# Allegro board My_AVRUSB500.brd
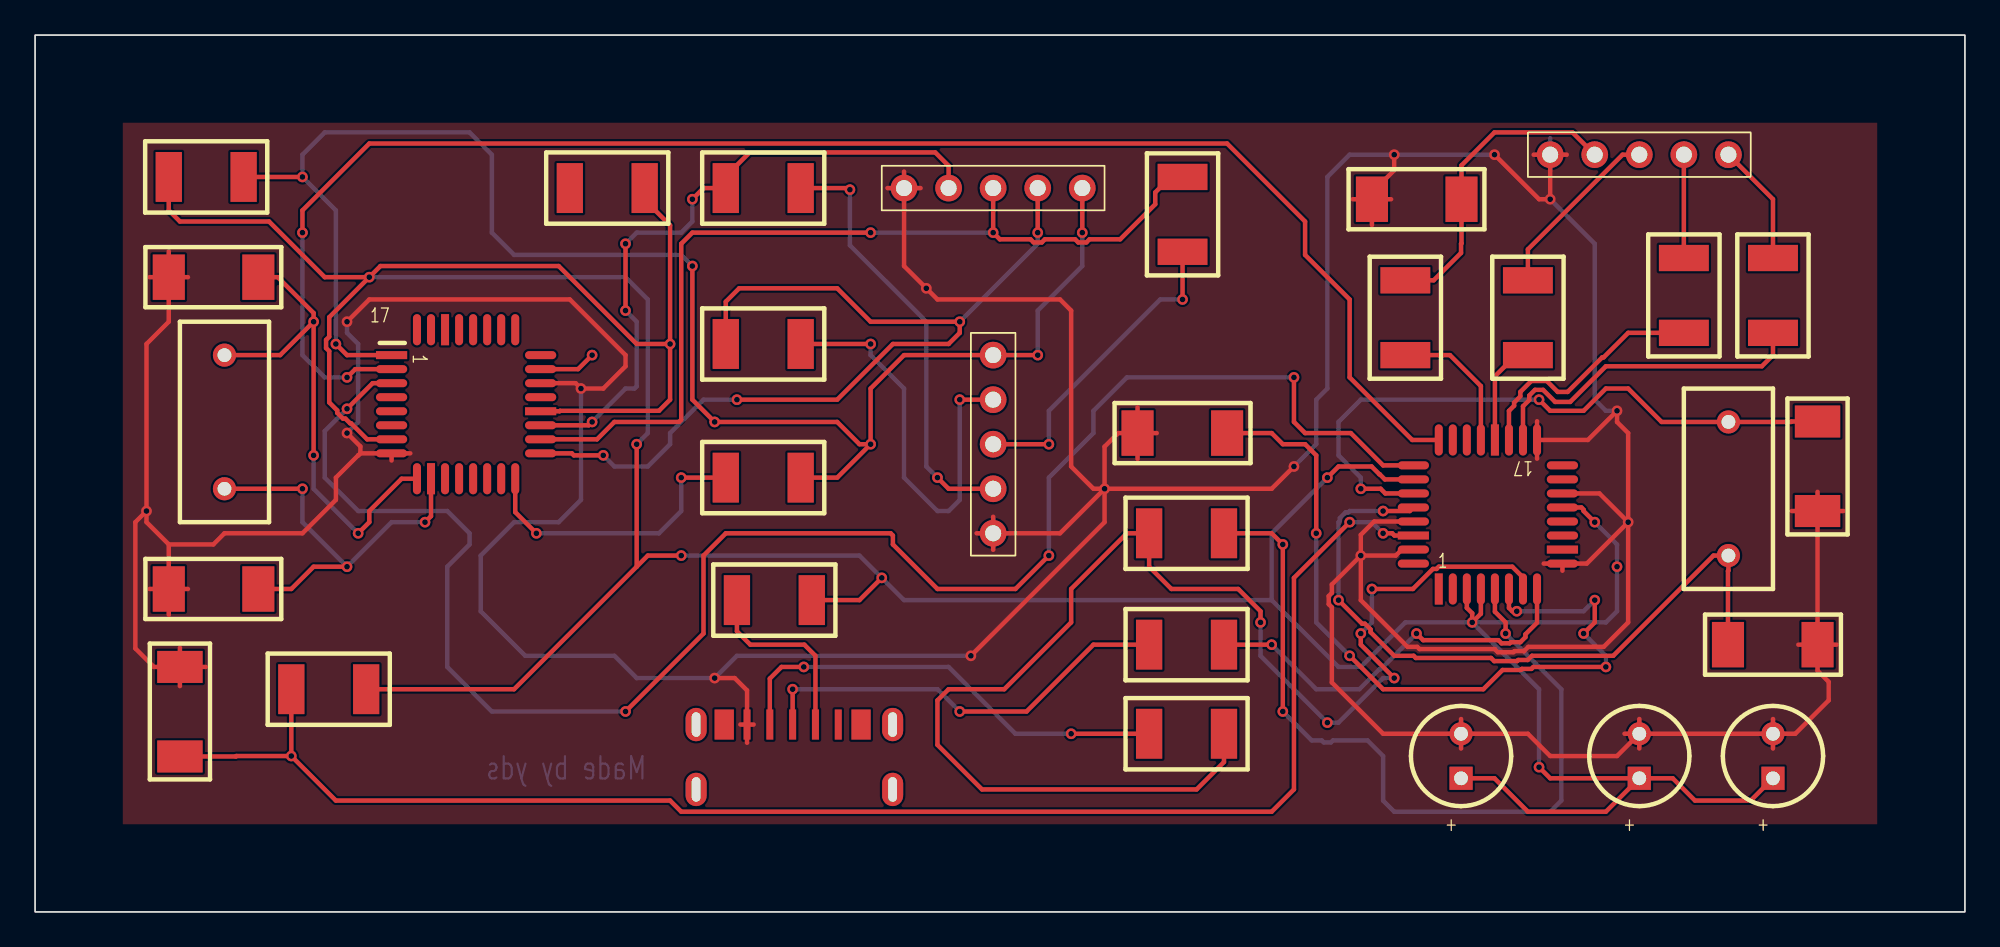
[diagram p0: board, top side]
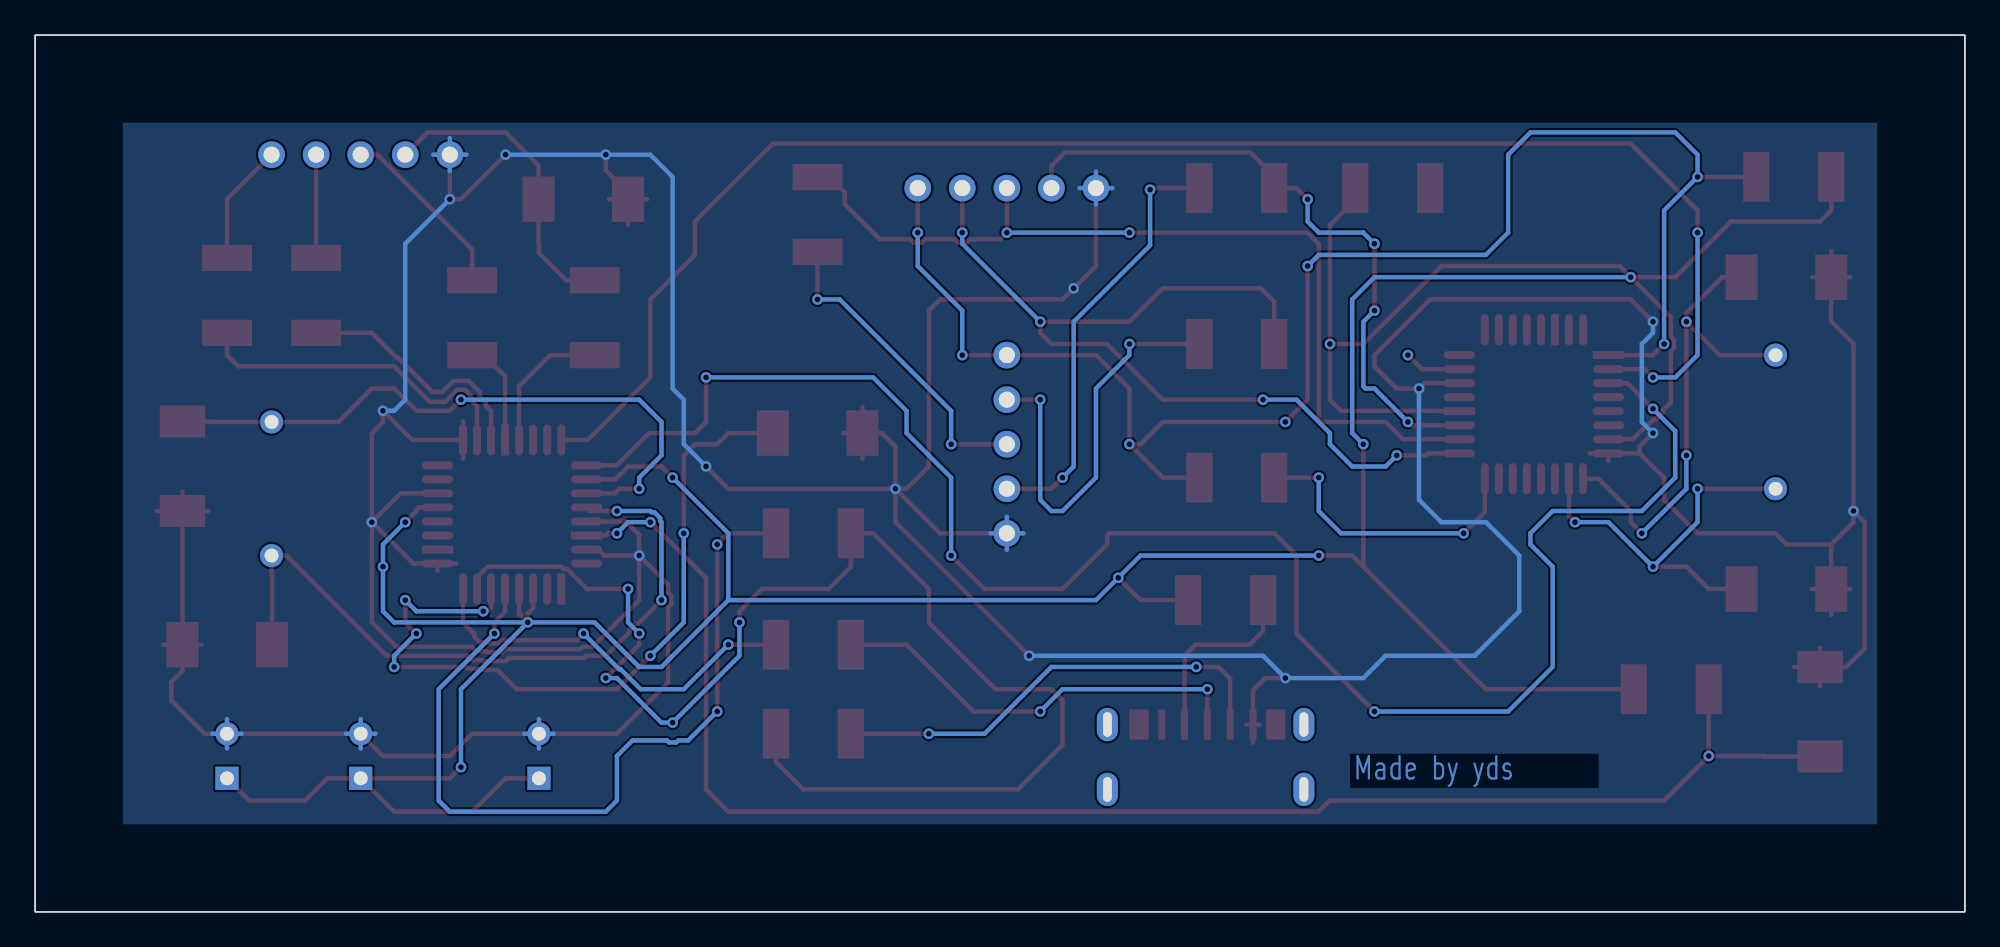
[diagram p1: board, bottom side, seen from below]

Outline 110 x 50 mm; copper layers: TOP, BOTTOM. Coordinates in mm from the lower left corner of the outline.
Outline path: rectangle 0,0 110,50

## Design rules (mm)
constraint set DEFAULT: min track width 0.127
net group POWERRULL: nets +5V VCC

## Placement (name value [footprint] x y rotation side)
C1  47nF  [CPCYL1D225LS100031#2]  8.26 13.97 270 top
C2  27pF  [CPCYL1D225LS100031#2]  101.6 15.24 180 top
C3  27pF  [CPCYL1D225LS100031#2]  101.6 22.86 90 top
C4  47nF  [CPCYL1D225LS100031#2]  67.94 27.3 180 top
C5  100nF  [CPCYL1D225LS100031]  91.44 7.62 90 top
C6  1uF  [CPCYL1D225LS100031]  99.06 7.62 90 top
C9  100nF  [CPCYL1D225LS100031]  81.28 7.62 90 top
C10  22nF  [CPCYL1D225LS100031#2]  76.2 40.64 0 top
C11  100nF  [CPCYL1D225LS100031#2]  7.62 36.2 0 top
C12  100nF  [CPCYL1D225LS100031#2]  7.62 18.41 0 top
IC2  ATmega8  [QUAD80M32WG900]  20.32 31.75 270 top
J1  bbpg_Bitbang  [JUMPER5]  96.52 43.18 180 top
J2  USBA  [MY_USB]  43.18 6.99 0 top
J5  avrusb500_out  [JUMPER5]  54.61 31.75 270 top
J6  firmware_in  [JUMPER5]  59.69 41.27 180 top
NOREF  -  []  0 50 0 top
NOREF#2  -  []  0 0 90 top
R1  470  [AX400X100031]  14.61 12.7 0 top
R2  220  [AX400X100031]  78.11 31.75 90 top
R3  220  [AX400X100031]  85.09 31.75 90 top
R4  220  [AX400X100031]  93.98 33.02 90 top
R5  27  [AX400X100031]  63.5 15.24 0 top
R6  27  [AX400X100031]  63.5 10.16 0 top
R7  1.5k  [AX400X100031]  63.5 21.59 0 top
R8  2.2  [AX400X100031]  40.01 17.78 0 top
R14  220  [AX400X100031]  99.06 33.02 90 top
R16  10k  [AX400X100031]  7.62 41.91 0 top
R17  470  [AX400X100031]  30.48 41.27 0 top
R18  1k  [AX400X100031]  39.37 41.27 0 top
R19  220  [AX400X100031]  65.41 41.91 270 top
R20  1k  [AX400X100031]  39.37 32.38 0 top
R21  220  [AX400X100031]  39.37 24.77 0 top
U1  FT232BM  [QUAD80M32WG900]  80.01 18.41 0 top
Y2  6Mhz  [RAD450X200LS300031]  96.52 20.32 90 top
Y3  3.6864Mhz  [RAD450X200LS300031]  10.79 24.13 90 top

## Library data of the parts
C1-C4 C10-C12 = CAPACITOR NON-POL: alternate symbols: (SMR2010)
C5 C9 = CAPACITOR NON-POL: alternate symbols: (SMDCAP)
C6 = CAPACITOR POL: alternate symbols: (SMDCAP)
IC2 = ATmega8-DIL28_2
J1 J5 J6 = CON5: User Part Number: ***
J2 = CON4_7
R1-R8 R14 R16-R21 = R: alternate symbols: (SML2015)
U1 = FT232BM_2: alternate symbols: (JEDECMS026)
Y2 Y3 = ZTA

## Footprints (pads in the part's own frame, mm; a bottom-side part is the same pattern mirrored in y, then rotated)
AX400X100031
  rect 1.499x2.845 smd: 1(0,0) 2(4.267,0)
CPCYL1D225LS100031
  rect 1.321x1.321 hole 0.787: 1(0,0)
  round 1.321 hole 0.787: 2(2.54,0)
CPCYL1D225LS100031#2
  rect 1.829x2.591 smd: 1(0,0) 2(5.105,0)
JUMPER5
  round 1.524 hole 0.914: 1(0,0) 2(2.54,0) 3(5.08,0) 4(7.62,0) 5(10.16,0)
MY_USB
  oval 1.2x1.9 hole 0.5x1.4: (-5.5,3.7) (-5.5,0) (5.7,3.7) (5.7,0)
  rect 1.1x1.72 smd: (-3.9,3.7) (3.9,3.7)
  rect 0.4x1.72 smd: 1(-2.6,3.7) 2(-1.3,3.7) 3(0,3.7) 4(1.3,3.7) 5(2.6,3.7)
QUAD80M32WG900
  rect 0.457x1.778 smd: 1(0,0) 20(3.2,8.496)
  oval 0.457x1.778 smd: 2(0.8,0) 3(1.6,0) 4(2.4,0) 5(3.2,0) 6(4,0) 7(4.801,0) 8(5.601,0) 17(5.601,8.496) 18(4.801,8.496) 19(4,8.496) 21(2.4,8.496) 22(1.6,8.496) 23(0.8,8.496) 24(0,8.496)
  oval 1.778x0.457 smd: 9(7.048,1.448) 11(7.048,3.048) 12(7.048,3.848) 13(7.048,4.648) 14(7.048,5.448) 15(7.048,6.248) 16(7.048,7.048) 25(-1.448,7.048) 26(-1.448,6.248) 27(-1.448,5.448) 28(-1.448,4.648) 29(-1.448,3.848) 31(-1.448,2.248) 32(-1.448,1.448)
  rect 1.778x0.457 smd: 10(7.048,2.248) 30(-1.448,3.048)
RAD450X200LS300031
  round 1.321 hole 0.787: 1(0,0) 2(7.62,0)

## Nets
+5V: J2.4 R8.1
GND: C1.1 C2.1 C3.1 C4.2 C5.2 C6.2 C9.2 C10.1 C11.1 C12.1 IC2.8 IC2.22 J1.5 J2.1 J5.5 J6.5 U1.9 U1.14 U1.17 U1.29 U1.31
VCC: C5.1 C6.1 C9.1 IC2.7(VCC) IC2.20 R1.2 R8.2 R16.1 R17.2 U1.3 U1.4 U1.13 U1.26
BMISO: J1.3 R3.2
BMOSI: J1.2 R4.2
BRESET: J1.1 R14.2
BSCK: C10.2 J1.4 R2.2
D+: J2.2 R6.1
D-: J2.3 R5.1
F_MISO: IC2.18 J6.3 R19.1
F_MOSI: IC2.17 J6.2 R20.1
F_SCK: IC2.19 J6.4 R18.1
MISO: J5.3 R19.2
MOSI: J5.2 R20.2
RESET: IC2.1 J5.1 J6.1 R16.2 R21.2
RXD: IC2.2 U1.24
SCK: J5.4 R18.2
TXD: IC2.3 U1.25
N02483: R6.2 R7.1 U1.7
N02615: R5.2 U1.8
N03527: C4.1 U1.6
N06839: R2.1 U1.21
N06967: R3.1 U1.20
N07033: R4.1 U1.19
N07247: R14.1 U1.18
N11951: R7.2 U1.5
N41098: C3.2 U1.27 Y2.2
N41106: C2.2 U1.28(XTOUT) Y2.1
N49165: C1.2 R1.1 U1.30
N99979: IC2.23
N99983: R17.1
N99995: C11.2 IC2.9 Y3.2
N100131: C12.2 IC2.10 Y3.1
N100273: IC2.16 R21.1

Pads without a net: IC2 4 5 6 11 12 13 14 15 21 24 25 26 27 28 29 30 31 32; J2 5; U1 1 2 10 11 12 15 16 22 23 32

## Via types
v1: diameter 0.61, hole 0.33, TOP to BOTTOM, 90 vias

## Routing (per net, layer and track width the routed paths; a pad name or vN(x,y) marks a point on that pad's centre or on a via; arc(x,y) is an arc through that point)
+5V: length 10.8
  TOP w0.254: J2.4 44.48,14.61 43.84,15.24 40.77,15.24 40.01,16 R8.1
GND: length 413
  TOP w0.254: v1(83.19,43.18) 85.72,40.64 v1(86.36,40.64) J1.5 ; U1.31 77.9,20.66 77.56,20.32 v1(75.56,20.32) ; C4.2 62.84,28.78 ; C4.2 63.93,27.3 ; C4.2 61.73,27.3 60.96,26.53 v1(60.96,24.13) ; C4.2 62.84,25.83 ; v1(60.96,24.13) 70.48,24.13 v1(71.75,25.4) ; v1(60.96,24.13) 60.96,22.23 v1(53.34,14.61) ; v1(60.96,24.13) 58.42,21.59 J5.5 ; v1(60.96,24.13) 60.33,24.13 59.05,25.4 59.05,34.29 58.42,34.92 51.44,34.92 v1(50.8,35.56) 49.53,36.83 J6.5 ; 81.28,9.32 C9.2 ; C9.2 85.09,10.16 86.36,8.89 90.17,8.89 C5.2 ; C9.2 76.83,10.16 73.92,13.08 73.92,17.37 73.74,17.55 73.74,18.01 73.92,18.19 73.92,18.67 v1(75.56,20.32) ; C9.2 81.28,11 ; C6.2 100.33,10.16 102.23,12.06 102.23,13.12 101.6,13.75 C2.1 ; C6.2 99.06,9.32 ; C6.2 C5.2 ; C6.2 99.06,11 ; 91.44,9.32 C5.2 ; C5.2 90.6,10.16 ; C5.2 91.44,11 ; v1(6.35,22.86) 6.35,22.23 7.62,20.95 ; v1(6.35,22.86) 5.71,22.23 5.71,15.02 6.77,13.97 C1.1 ; v1(6.35,22.86) 6.35,32.38 7.62,33.66 C11.1 ; 54.61,20.65 J5.5 ; J5.5 54.61,22.53 ; J5.5 53.67,21.59 ; C12.1 8.71,18.41 ; C12.1 6.53,18.41 ; C12.1 7.62,20.95 ; C12.1 7.62,16.94 ; v1(90.81,22.23) 88.44,19.86 U1.9 ; v1(90.81,22.23) 90.81,16.51 89.41,15.11 85.11,15.11 84.87,14.87 84.33,14.87 84.26,14.81 83.38,14.81 83.2,14.99 78.91,14.99 78.78,15.11 78.23,15.11 75.56,17.78 v1(75.56,20.32) ; v1(90.81,22.23) 89.17,23.86 U1.14 ; v1(90.81,22.23) 90.81,27.3 90.17,27.94 v1(90.17,28.57) 88.51,26.91 U1.17 ; C11.1 8.71,36.2 ; C11.1 6.53,36.2 ; C11.1 7.62,37.67 ; C3.1 103.07,22.86 ; C3.1 C2.1 ; C3.1 100.13,22.86 ; C3.1 101.6,23.95 ; v1(77.47,43.18) 77.47,42.29 76.2,41.02 C10.1 ; 87.06,19.46 U1.9 ; U1.9 85.99,19.86 ; v1(17.78,33.66) 19.05,34.92 30.48,34.92 33.66,31.75 33.66,31.11 32.38,29.84 v1(31.11,29.84) 30.81,30.15 IC2.22 ; v1(38.73,13.34) 39.88,13.34 40.58,12.63 J2.1 ; v1(75.56,20.32) 75.56,21.5 76.33,22.26 U1.29 ; C1.1 8.26,12.88 ; C1.1 8.26,15.06 ; C1.1 9.73,13.97 ; IC2.8 18.54,26.15 ; IC2.8 21.39,26.15 ; IC2.8 20.32,25.74 ; 18.54,26.15 18.43,26.04 18.41,26.04 17.14,24.77 17.14,23.5 15.24,21.59 10.79,21.59 10.16,20.95 7.62,20.95 ; 18.54,26.15 18.54,26.54 v1(17.78,27.3) ; J6.5 50.47,41.27 ; J6.5 49.53,42.22 ; J6.5 48.59,41.27 ; C2.1 100.51,15.24 ; C2.1 102.69,15.24 ; J1.5 87.3,43.18 ; J1.5 85.42,43.18 ; C10.1 76.2,39.17 ; C10.1 75.11,40.64 ; C10.1 77.29,40.64 ; J2.1 40.58,9.65 ; J2.1 40.96,10.69 ; J2.1 40.2,10.69 ; 85.61,25.84 U1.17 ; U1.17 85.61,27.98
  BOTTOM w0.254: 53.67,21.59 J5.5 ; J5.5 55.55,21.59 ; J5.5 54.61,22.53 ; J5.5 54.61,20.65 ; C5.2 91.44,11 ; C5.2 91.44,9.32 ; C5.2 92.28,10.16 ; C5.2 90.6,10.16 ; 99.06,9.32 C6.2 ; C6.2 99.9,10.16 ; C6.2 99.06,11 ; C6.2 98.22,10.16 ; 49.53,40.34 J6.5 ; J6.5 50.47,41.27 ; J6.5 49.53,42.22 ; J6.5 48.59,41.27 ; v1(86.36,40.64) 88.9,38.1 88.9,29.21 89.53,28.57 v1(90.17,28.57) ; v1(17.78,33.66) 17.78,33.02 18.41,32.38 18.41,27.94 v1(17.78,27.3) ; J1.5 86.36,44.12 ; J1.5 86.36,42.24 ; J1.5 87.3,43.18 ; J1.5 85.42,43.18 ; v1(31.11,29.84) 31.11,23.5 29.84,22.23 27.3,22.23 25.4,20.32 25.4,17.14 27.94,14.61 33.02,14.61 34.29,13.34 v1(38.73,13.34) 40.01,14.61 v1(53.34,14.61) ; C9.2 81.28,11 ; C9.2 81.28,9.32 ; C9.2 82.12,10.16 ; C9.2 80.44,10.16 ; v1(83.19,43.18) v1(77.47,43.18) 74.93,43.18 73.66,41.91 73.66,29.84 73.03,29.21 73.03,26.67 v1(71.75,25.4)
VCC: length 244
  TOP w0.254: R8.2 46.99,17.78 v1(48.26,19.05) ; R16.1 7.62,40.01 8.26,39.37 13.34,39.37 16.51,36.2 v1(19.05,36.2) ; U1.3 81.61,17.34 81.92,17.03 v1(81.92,16.51) 82.41,17.01 U1.4 ; C6.1 97.79,6.35 94.61,6.35 93.34,7.62 C5.1 ; U1.26 76.94,24.66 76.64,24.96 76.62,24.96 76.18,25.4 74.3,25.4 v1(73.66,24.77) ; v1(19.05,36.2) 19.68,36.83 29.84,36.83 34.29,32.38 v1(36.2,32.38) ; v1(19.05,36.2) 16.76,33.91 16.76,32.8 16.59,32.62 16.59,32.15 16.76,31.97 16.76,29.05 17.22,28.6 17.22,28.46 17.55,28.13 17.69,28.13 17.95,27.86 18.01,27.86 18.93,26.95 IC2.7 ; C5.1 86.36,7.62 v1(85.72,8.26) ; C5.1 89.53,5.71 85.09,5.71 83.19,7.62 C9.1 ; R17.2 34.75,40.6 36.2,39.15 v1(36.2,32.38) ; v1(36.2,32.38) 36.2,29.21 35.56,28.57 29.92,28.57 29.9,28.55 IC2.20 ; 34.29,19.68 34.92,20.32 v1(36.83,20.32) ; 34.29,19.68 v1(34.29,26.67) ; 34.29,19.68 27.3,12.7 R1.2 ; U1.13 88.14,23.06 88.27,22.94 88.27,22.86 v1(88.9,22.23)
  BOTTOM w0.254: v1(19.05,36.2) 33.66,36.2 34.92,34.92 34.92,27.3 v1(34.29,26.67) ; v1(88.9,22.23) 90.17,20.95 v1(90.17,19.68) 90.17,17.14 89.53,16.51 v1(81.92,16.51) ; v1(81.92,16.51) 85.72,12.7 v1(85.72,8.26) ; v1(81.92,16.51) 78.11,16.51 75.56,13.97 74.3,13.97 70.48,17.78 ; v1(36.83,20.32) 46.99,20.32 v1(48.26,19.05) 49.53,17.78 70.48,17.78 ; 70.48,17.78 70.48,21.59 v1(73.66,24.77)
BMISO: length 10.4
  TOP w0.254: R3.2 85.09,37.78 90.49,43.18 J1.3
BMOSI: length 5.9
  TOP w0.254: J1.2 R4.2
BRESET: length 6.9
  TOP w0.254: J1.1 99.06,40.64 R14.2
BSCK: length 17.7
  TOP w0.254: R2.2 79.72,36.02 81.28,37.58 81.28,38.1 81.31,38.13 C10.2 81.31,42.57 83.19,44.45 87.63,44.45 J1.4
D+: length 26.1
  TOP w0.254: J2.2 41.88,13.3 42.55,13.97 v1(43.81,13.97) ; v1(59.05,10.16) R6.1
  BOTTOM w0.254: v1(59.05,10.16) 55.88,10.16 52.07,13.97 v1(43.81,13.97)
D-: length 24.4
  TOP w0.254: v1(52.7,11.43) 56.52,11.43 60.33,15.24 R5.1 ; J2.3 v1(43.18,12.7)
  BOTTOM w0.254: v1(52.7,11.43) 51.44,12.7 v1(43.18,12.7)
F_MISO: length 52.2
  TOP w0.254: v1(47.62,38.73) 37.47,38.73 36.83,38.1 36.83,28.07 36.7,27.94 33.02,27.94 32.03,26.95 IC2.18 ; J6.3 v1(54.61,38.73) 54.99,38.35 56.74,38.35 56.92,38.18 57.38,38.18 57.56,38.35 59.28,38.35 59.46,38.18 59.92,38.18 60.1,38.35 61.85,38.35 63.85,40.35 63.85,41.03 64.73,41.91 R19.1
  BOTTOM w0.254: v1(47.62,38.73) v1(54.61,38.73)
F_MOSI: length 54.7
  TOP w0.254: J6.2 v1(57.15,38.73) ; IC2.17 30.59,26.15 30.71,26.04 v1(32.38,26.04) ; R20.1 39.37,34.8 40.13,35.56 45.72,35.56 47.62,33.66 v1(52.7,33.66) 52.7,33.02 52.07,32.38 48.9,32.38 45.72,29.21 v1(40.01,29.21)
  BOTTOM w0.254: v1(32.38,26.04) 33.02,25.4 34.92,25.4 36.2,26.67 36.2,27.3 38.1,29.21 v1(40.01,29.21) ; v1(57.15,38.73) 57.15,38.1 v1(52.7,33.66)
F_SCK: length 38.1
  TOP w0.254: v1(31.75,27.94) 31.56,27.75 IC2.19 ; v1(37.47,40.64) 38.1,41.27 R18.1 39.37,41.95 40.73,43.31 51.31,43.31 52.07,42.55 J6.4 ; v1(33.66,38.1) v1(33.66,34.29)
  BOTTOM w0.254: v1(31.75,27.94) 33.66,29.84 34.16,29.84 34.29,29.97 34.29,33.66 v1(33.66,34.29) ; v1(33.66,38.1) 34.29,38.73 36.83,38.73 37.47,39.37 v1(37.47,40.64)
MISO: length 18
  TOP w0.254: R19.2 v1(65.41,34.92) ; v1(57.78,26.67) J5.3
  BOTTOM w0.254: v1(65.41,34.92) 64.13,34.92 57.78,28.58 v1(57.78,26.67)
MOSI: length 24.2
  TOP w0.254: R20.2 v1(47.62,32.38) ; v1(52.7,29.21) J5.2
  BOTTOM w0.254: v1(52.7,29.21) 52.7,23.5 52.07,22.86 51.44,22.86 49.53,24.77 49.53,29.84 47.62,31.75 v1(47.62,32.38)
RESET: length 94.6
  TOP w0.254: IC2.1 17.78,31.75 v1(17.14,32.38) ; J6.1 v1(59.69,38.73) ; v1(47.62,26.67) 45.72,24.77 R21.2 ; v1(47.62,26.67) 47.62,29.84 49.53,31.75 J5.1 v1(57.15,31.75) ; v1(47.62,26.67) 46.99,26.67 45.72,27.94 v1(38.73,27.94) 37.47,29.21 v1(37.47,36.83) ; v1(15.24,41.91) R16.2
  BOTTOM w0.254: v1(57.15,31.75) 57.15,34.29 59.69,36.83 v1(59.69,38.73) ; v1(17.14,32.38) 17.14,40.01 v1(15.24,41.91) 15.24,43.18 16.51,44.45 24.77,44.45 26.04,43.18 26.04,38.73 27.3,37.47 36.83,37.47 v1(37.47,36.83)
RXD: length 91.1
  TOP w0.254: IC2.2 18.25,30.95 v1(17.78,30.48) ; v1(15.24,38.73) 15.24,40.01 19.05,43.81 67.94,43.81 72.39,39.37 72.39,37.47 74.93,34.92 74.93,30.48 78.5,26.91 U1.24
  BOTTOM w0.254: v1(17.78,30.48) 16.51,30.48 15.24,31.75 v1(15.24,38.73)
SCK: length 24.8
  TOP w0.254: R18.2 46.35,41.27 v1(46.44,41.19) ; J5.4 52.07,24.13 v1(51.44,24.77)
  BOTTOM w0.254: v1(51.44,24.77) 50.8,25.4 50.8,33.66 46.44,38.01 v1(46.44,41.19)
TXD: length 101.8
  TOP w0.254: IC2.3 19.24,30.15 v1(17.78,28.69) ; v1(33.66,11.43) 38.1,15.88 38.1,20.32 39.37,21.59 48.77,21.59 48.9,21.46 48.9,20.95 51.44,18.41 55.88,18.41 v1(57.78,20.32) ; U1.25 76.83,25.46 74.99,27.3 72.39,27.3 71.75,27.94 v1(71.75,30.48)
  BOTTOM w0.254: v1(17.78,28.69) 16.51,27.42 16.51,24.77 18.41,22.86 23.5,22.86 24.77,21.59 24.77,20.95 23.5,19.68 23.5,13.97 26.04,11.43 v1(33.66,11.43) ; v1(57.78,20.32) 57.78,24.77 60.33,27.3 60.33,28.57 62.23,30.48 v1(71.75,30.48)
N02483: length 77.6
  TOP w0.254: v1(75.56,15.88) 75.56,15.24 v1(77.47,13.34) ; U1.7 84.81,19.08 84.2,19.68 80.01,19.68 79.88,19.56 79.68,19.56 78.53,18.41 v1(76.2,18.41) ; v1(69.85,16.51) 69.85,17.14 68.58,18.41 64.77,18.41 63.5,19.68 R7.1 62.23,21.59 59.05,18.41 59.05,16.51 55.24,12.7 52.07,12.7 51.44,12.06 51.44,9.53 53.98,6.99 66.21,6.99 67.77,8.55 R6.2
  BOTTOM w0.254: v1(69.85,16.51) 69.85,14.61 v1(73.66,10.79) 74.3,10.79 76.83,13.34 v1(77.47,13.34) ; v1(75.56,15.88) 76.2,16.51 v1(76.2,18.41)
N02615: length 22.9
  TOP w0.254: v1(78.74,15.88) 79.12,15.49 83.41,15.49 83.59,15.32 84.05,15.32 84.11,15.38 84.66,15.38 84.95,15.67 84.95,15.83 85.61,16.49 U1.8 ; v1(70.48,15.24) R5.2
  BOTTOM w0.254: v1(70.48,15.24) 73.03,12.7 75.48,12.7 76.62,13.84 76.71,13.84 v1(78.74,15.88)
N03527: length 44.7
  TOP w0.254: v1(74.93,14.61) 76.83,12.7 82.55,12.7 83.65,13.8 84.68,13.8 84.75,13.86 85.29,13.86 85.4,13.97 v1(89.53,13.97) ; v1(88.27,15.88) 88.9,16.51 v1(88.9,17.78) ; C4.1 70.48,27.3 71.12,26.67 72.39,26.67 73.03,26.04 v1(73.03,21.59) ; v1(84.45,17.14) 84.2,17.14 84.01,17.34 U1.6
  BOTTOM w0.254: v1(84.45,17.14) 88.27,17.14 v1(88.9,17.78) ; v1(89.53,13.97) 89.53,14.61 v1(88.27,15.88) ; v1(74.93,14.61) 73.03,16.51 v1(73.03,21.59)
N06839: length 8.1
  TOP w0.254: R2.1 80.64,31.75 82.41,29.98 U1.21
N06967: length 6
  TOP w0.254: U1.20 83.21,30.54 84.42,31.75 R3.1
N07033: length 14.2
  TOP w0.254: U1.19 84.01,28.57 84.3,28.86 84.3,29.04 84.66,29.4 84.66,29.65 85.28,30.28 86.17,30.28 86.79,29.65 87.35,29.65 89.32,31.62 89.41,31.62 90.81,33.02 R4.1
N07247: length 19.4
  TOP w0.254: U1.18 84.81,28.83 85.17,29.19 85.17,29.44 85.49,29.77 85.96,29.77 86.64,29.08 87.5,29.08 89.53,31.11 98.42,31.11 99.06,31.75 R14.1
N11951: length 46.9
  TOP w0.254: v1(71.12,11.43) v1(71.12,20.95) 70.48,21.59 R7.2 ; U1.5 83.21,17.12 83.82,16.51 v1(83.82,15.88)
  BOTTOM w0.254: v1(83.82,15.88) 87,12.7 87,6.35 86.36,5.71 77.47,5.71 76.83,6.35 76.83,8.89 75.95,9.78 73.98,9.78 73.87,9.66 73.45,9.66 73.34,9.78 72.77,9.78 v1(71.12,11.43)
N41098: length 36.9
  TOP w0.254: v1(85.72,29.21) 86.36,28.57 88.27,28.57 89.53,29.84 90.81,29.84 92.71,27.94 Y2.2 100.09,27.94 100.11,27.97 C3.2 ; U1.27 76.96,23.86 76.7,24.13 v1(75.56,24.13)
  BOTTOM w0.254: v1(75.56,24.13) 75.56,24.77 74.3,26.04 74.3,27.94 75.56,29.21 v1(85.72,29.21)
N41106: length 40.5
  TOP w0.254: U1.28 78.36,22.86 v1(76.83,22.86) ; v1(74.3,17.78) 75.64,16.43 75.8,16.43 76.12,16.11 76.12,15.95 77.47,14.61 78.58,14.61 78.7,14.48 82.99,14.48 83.17,14.3 84.47,14.3 84.54,14.37 85.08,14.37 85.32,14.61 89.95,14.61 95.67,20.32 Y2.1 96.52,19.47 96.49,19.44 C2.2
  BOTTOM w0.254: v1(74.3,17.78) 74.3,22.23 74.37,22.3 74.37,22.46 74.7,22.78 74.85,22.78 74.93,22.86 v1(76.83,22.86)
N49165: length 89.7
  TOP w0.254: v1(76.83,21.59) 77.36,21.59 77.48,21.46 U1.30 ; v1(14.61,8.89) 11.47,8.89 11.44,8.86 C1.2 ; v1(14.61,8.89) 17.14,6.35 36.2,6.35 36.83,5.71 70.48,5.71 71.75,6.99 71.75,19.05 v1(74.93,22.23) ; v1(14.61,8.89) R1.1
  BOTTOM w0.254: v1(76.83,21.59) 76.2,22.23 v1(74.93,22.23)
N99979: length 3.3
  TOP w0.254: IC2.23 30.95,30.95 v1(31.75,31.75)
N99995: length 28.5
  TOP w0.254: Y3.2 13.97,31.75 v1(15.88,33.66) ; v1(18.41,21.59) 19.05,22.23 19.05,22.86 20.89,24.7 IC2.9 ; C11.2 13.83,36.2 15.88,34.15 v1(15.88,33.66) ; v1(15.88,33.66) v1(15.88,26.04)
  BOTTOM w0.254: v1(18.41,21.59) 15.88,24.13 v1(15.88,26.04)
N100131: length 23.6
  TOP w0.254: v1(15.24,24.13) Y3.1 ; v1(17.78,19.68) 15.88,19.68 14.61,18.41 C12.2 ; IC2.10 22.57,22.57 v1(22.23,22.23)
  BOTTOM w0.254: v1(15.24,24.13) 15.24,22.23 v1(17.78,19.68) 20.32,22.23 v1(22.23,22.23)
N100273: length 16.8
  TOP w0.254: IC2.16 27.37,22.8 v1(28.57,21.59) ; v1(36.83,24.77) R21.1
  BOTTOM w0.254: v1(28.57,21.59) 35.56,21.59 36.83,22.86 v1(36.83,24.77)

## Copper pours and planes (outline as drawn; the poured copper is in the pictures)
GND on TOP, BOTTOM: 5,45 105,45 105,5 5,5

## Text on the board
BOTTOM: Made by yds
USER_PART_NUM_TOP: FIGURE | FINISHED_SIZE | 0.3302 | 0.7869 | 0.9144 | 1.4x0.5001 | DRILL CHART: TOP to BOTTOM | ALL UNITS ARE IN MILLIMETERS | ROTATION | - | 90.000 | PLATED | QTY | 90 | 10 | 15 | 4
